# Altium PCB thesis_panel.PcbDoc
Units mm, origin at the board's own origin, x right, y up, seen from the top; angles counter-clockwise.
Board outline 100 x 100 mm, 4 copper layers (Top Layer, Layer 1, Layer 2, Bottom Layer), stack 0.603 mm thick; 6 components, 0 nets, 56 pads, 0 vias.
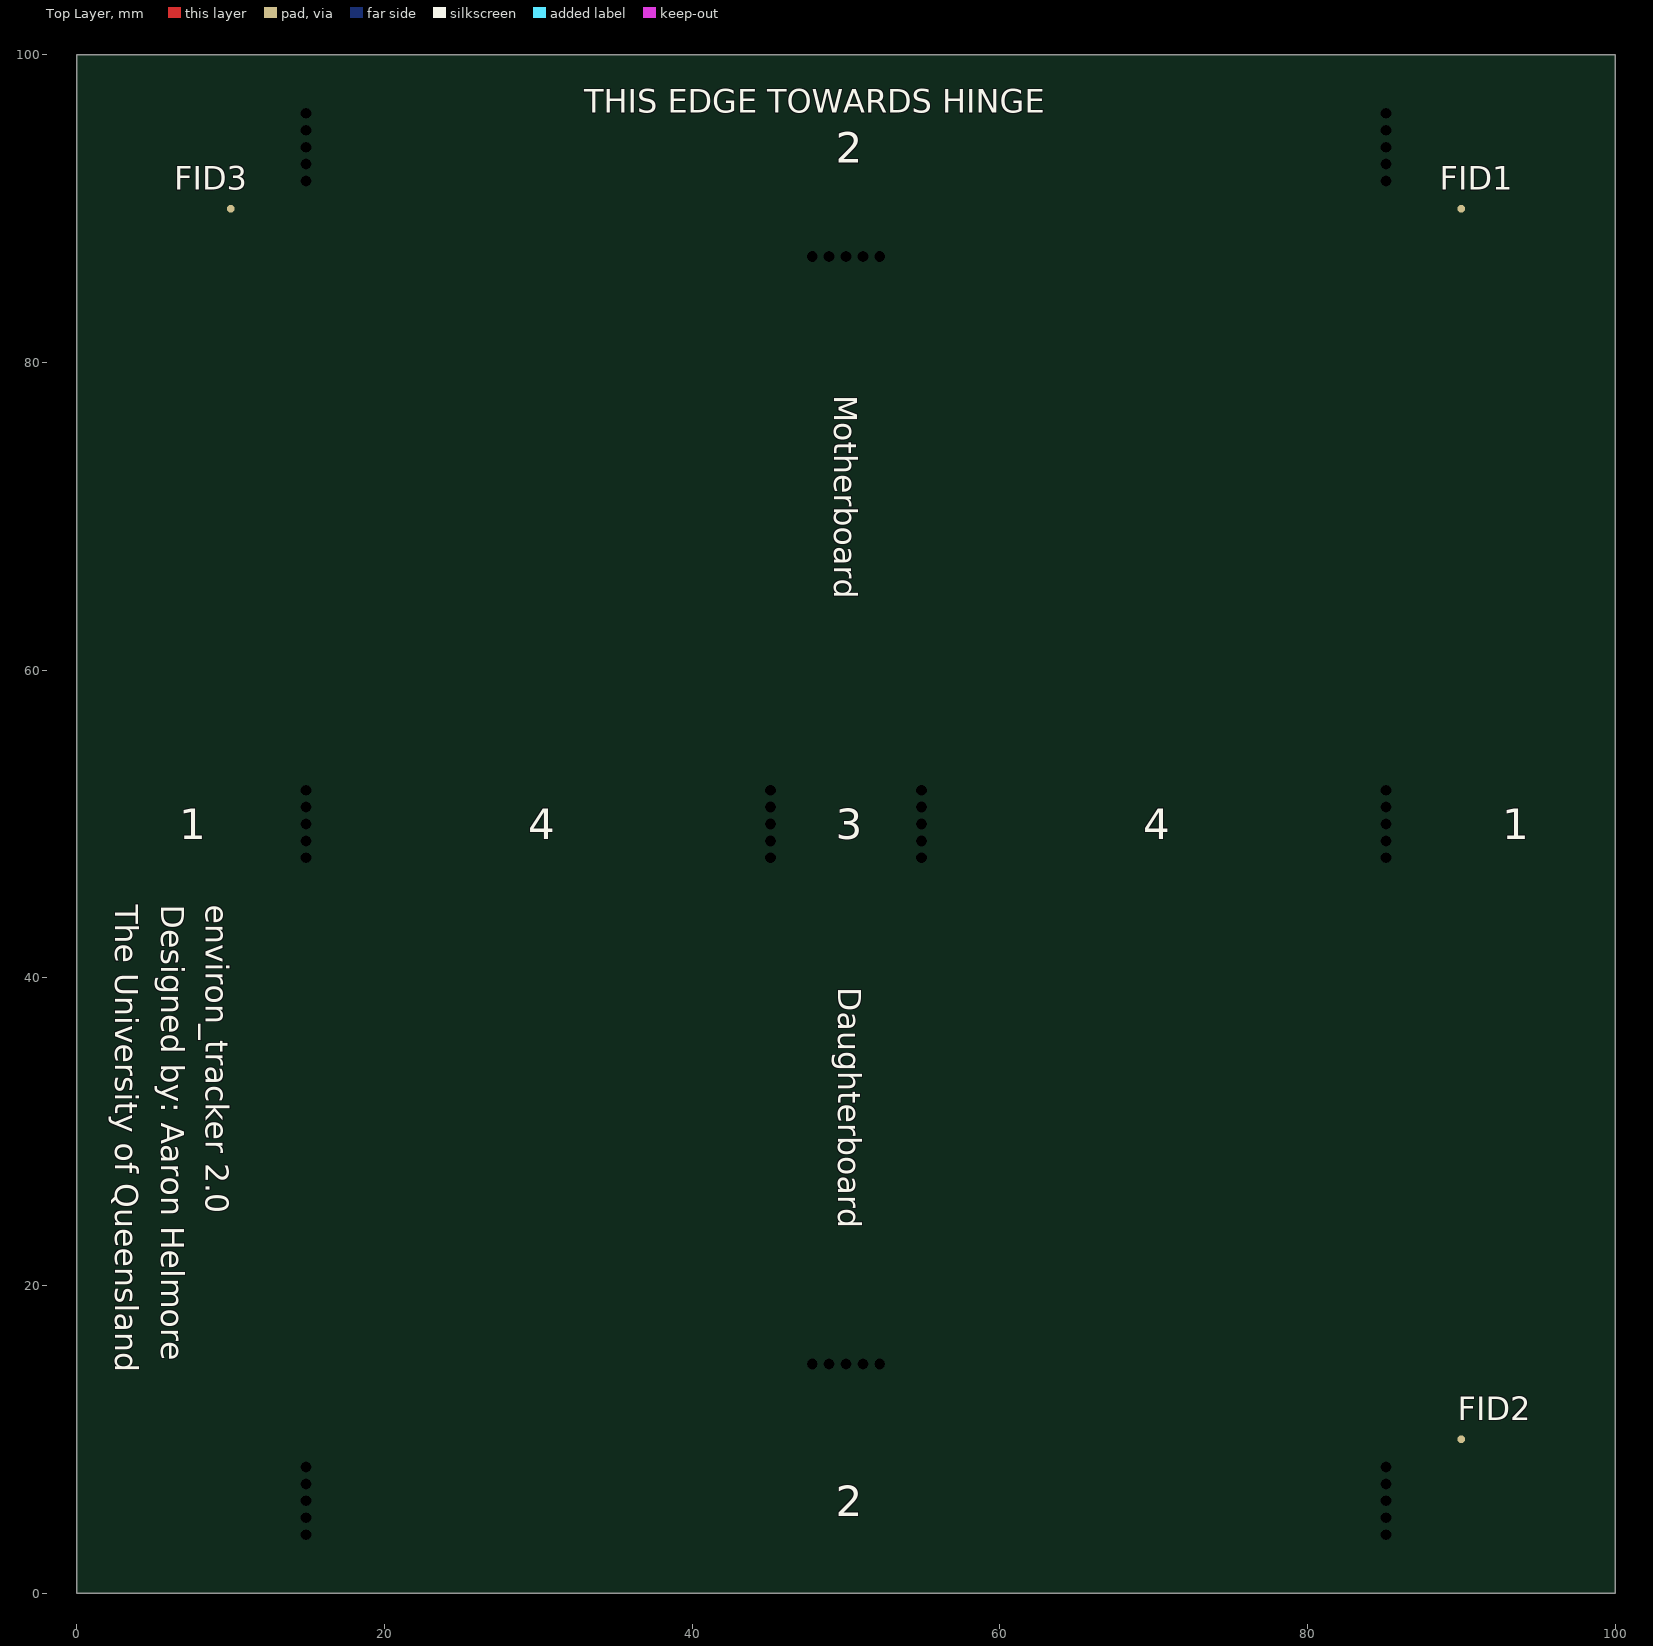
[diagram p0: Top Layer view]
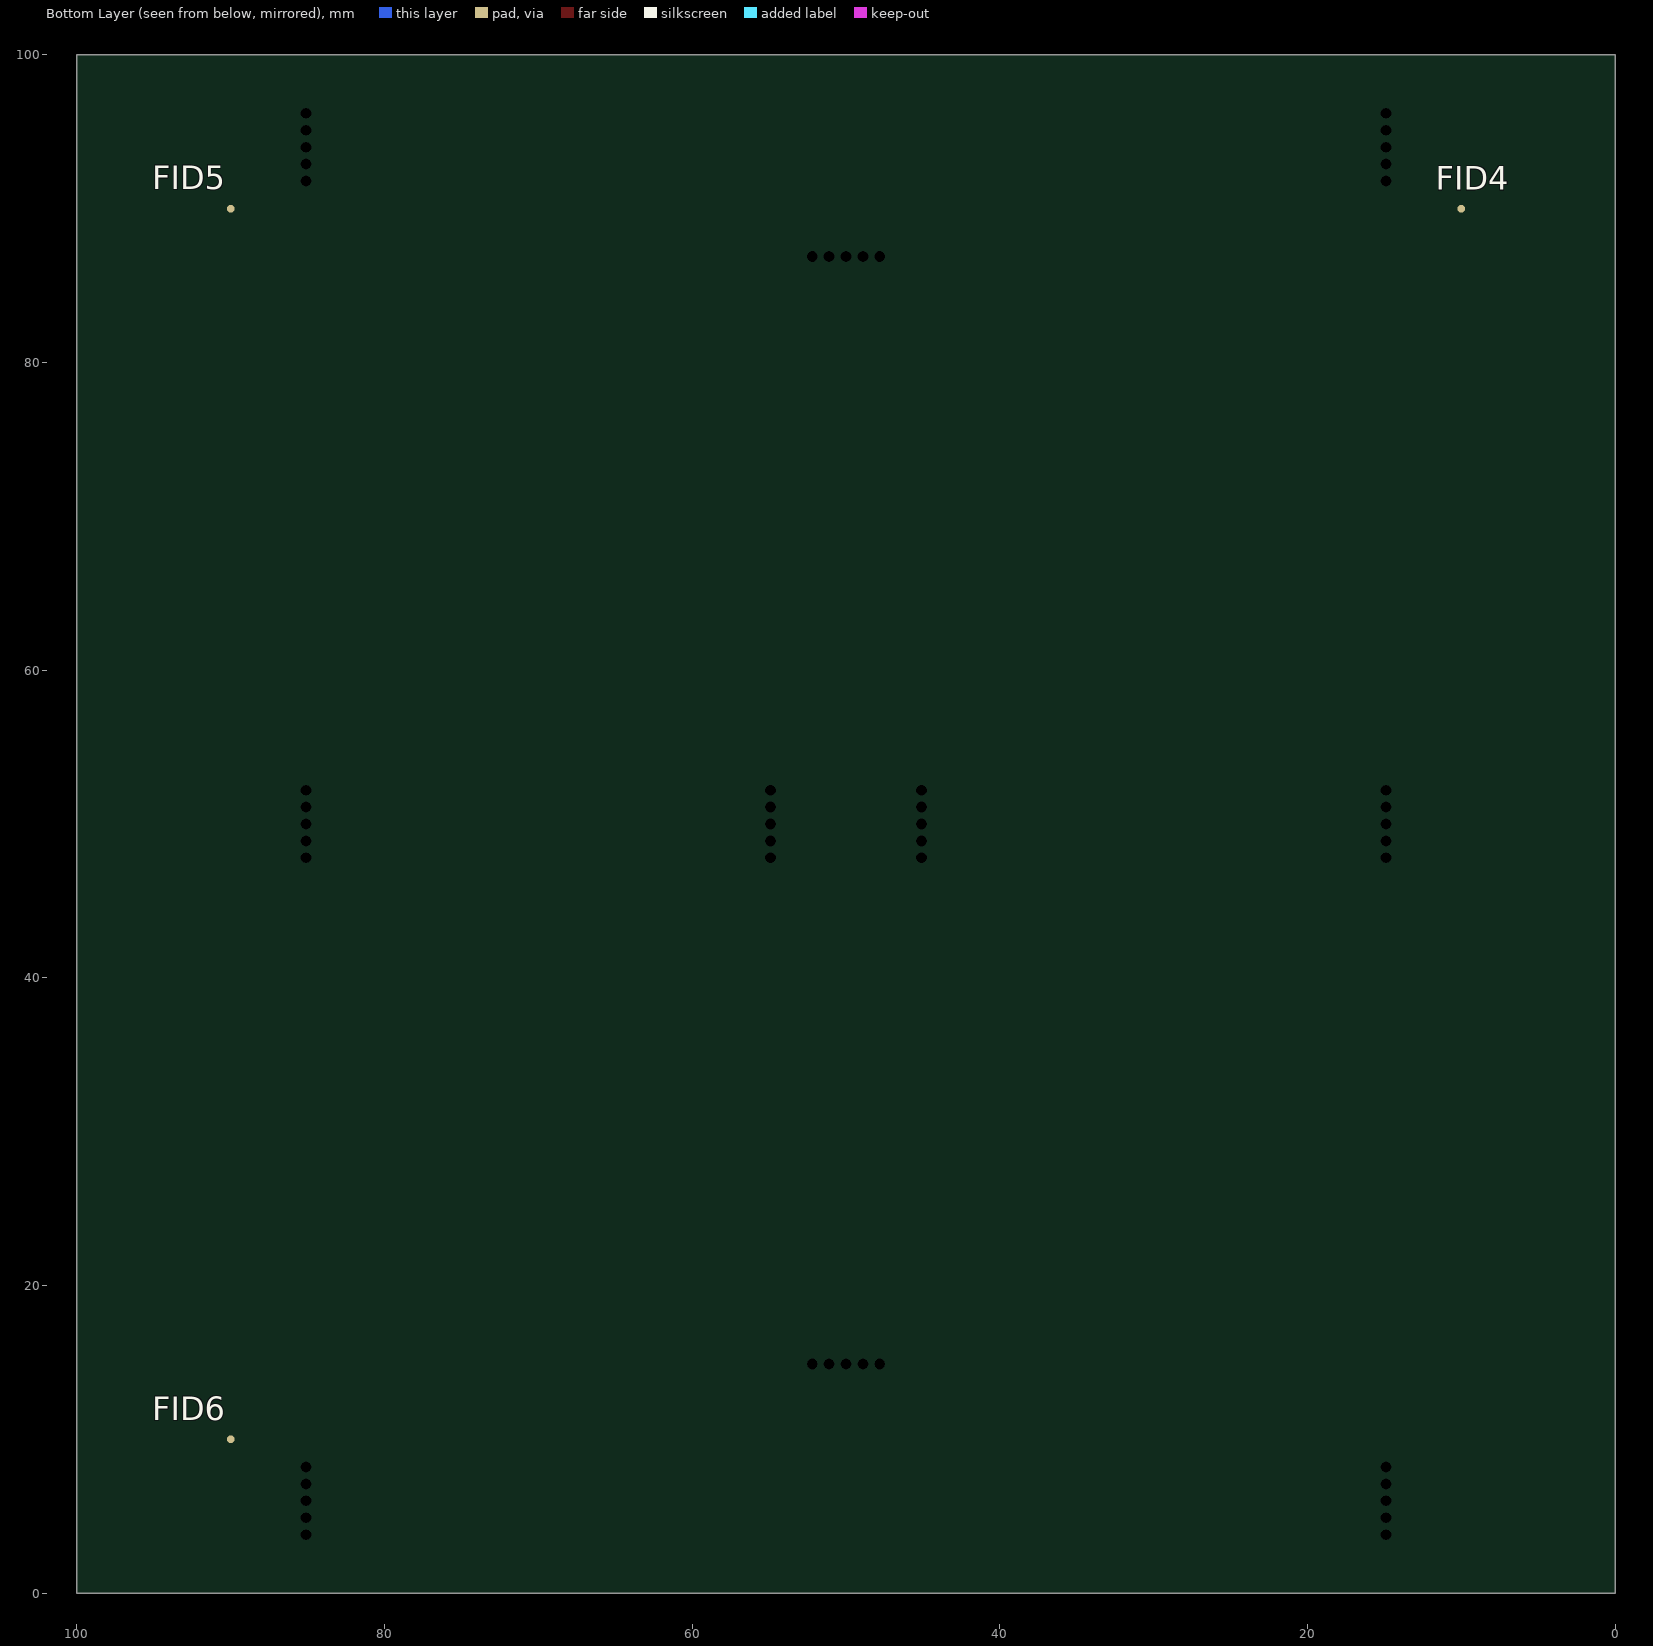
[diagram p1: Bottom Layer view, seen from below]

## Layer stack, top to bottom
Top Solder: solder mask 0.0102, Solder Resist, Dk 3.5
Top Layer: signal copper 0.0356
Dielectric 2: prepreg 0.0711, PP-006, Dk 4.1
Layer 1: signal copper 0.035
Dielectric 1: dielectric 0.32, FR-4, Dk 4.8
Layer 2: signal copper 0.035
Dielectric 3: prepreg 0.0711, PP-006, Dk 4.1
Bottom Layer: signal copper 0.0356
Bottom Solder: solder mask 0.0102, Solder Resist, Dk 3.5

## Board outline
0,0 0,100 100,100 100,0

## Design rules (kind name [scope] priority, off if disabled: settings)
Clearance [All] p1: gap=0.254 ignorepadtopadclearanceinfootprint=FALSE except(0: Arc-Hole Track-Hole SMDPad-Hole THPad-Hole Via-Hole Fill-Hole Poly-Hole Region-Hole Text-Hole)
MaxMinImpedance "Schematic Impedance Constraint_2" [InNetClass('ZOE_RF_LINES')] p1: minimum=49.50 maximum=50.50
MaxMinImpedance "Schematic Impedance Constraint_1" [InNetClass('SX_RF_LINES')] p2: minimum=49.50 maximum=50.50
MaxMinImpedance "Schematic Impedance Constraint" [InNetClass('NRF_RF_LINES')] p3: minimum=49.50 maximum=50.50
PolygonConnect [All] p1: connectstyle=Relief reliefconductorwidth=0.254 reliefentries=4 polygonreliefangle="90 Angle" airgapwidth=0.254
RoutingVias [All] p1: holewidth=0.711 width=1.27 viastyle="Through Hole" minholewidth=0.711 minwidth=1.27 maxholewidth=0.711 maxwidth=1.27
SolderMaskExpansion [All] p1: expansion=0.102 istentingtop=FALSE
Width [All] p1: maxlimit=0.254 minlimit=0.254 preferedwidth=0.254
30 further rules are at their usual default settings.

## Classes and differential pairs
component class MCU: P1

## Components (designator, comment, footprint, x,y, rotation, side; value= is the part's Value field where it differs from the comment)
FID1 "Comment" FIDUCIAL_0.5MM_SOLDER_1MM_MASK 90,90 r0 top
FID2 "Comment" FIDUCIAL_0.5MM_SOLDER_1MM_MASK 90,10 r0 top
FID3 "Comment" FIDUCIAL_0.5MM_SOLDER_1MM_MASK 10,90 r0 top
FID4 "Comment" FIDUCIAL_0.5MM_SOLDER_1MM_MASK 10,90 r180 bottom
FID5 "Comment" FIDUCIAL_0.5MM_SOLDER_1MM_MASK 90,90 r180 bottom
FID6 "Comment" FIDUCIAL_0.5MM_SOLDER_1MM_MASK 90,10 r180 bottom

## Footprints (in the part's own frame and the unit in brackets; to place one, negate y for a bottom-side part, rotate by r counter-clockwise, add the part's x,y. Pads: shape width x height; smd on the part's side, far side on the other; paste and mask are expansions set on the pad)
FIDUCIAL_0.5MM_SOLDER_1MM_MASK [mm]
  round 0.5 smd mask+0.25: 1(0,0)

## Free pads (board coordinates)
  round 0.2 hole 0.7 unplated paste+0 mask+0: MB(14.9,3.8) MB(14.9,4.9) MB(14.9,6) MB(14.9,7.1) MB(14.9,8.2) MB(14.9,47.8) MB(14.9,48.9) MB(14.9,50) MB(14.9,51.1) MB(14.9,52.2) MB(14.9,91.8) MB(14.9,92.9) MB(14.9,94) MB(14.9,95.1) MB(14.9,96.2) MB(45.1,47.8) MB(45.1,48.9) MB(45.1,50) MB(45.1,51.1) MB(45.1,52.2) MB(47.8,14.9) MB(47.8,86.9) MB(48.9,14.9) MB(48.9,86.9) MB(50,14.9) MB(50,86.9) MB(51.1,14.9) MB(51.1,86.9) MB(52.2,14.9) MB(52.2,86.9) MB(54.9,47.8) MB(54.9,48.9) MB(54.9,50) MB(54.9,51.1) MB(54.9,52.2) MB(85.1,3.8) MB(85.1,4.9) MB(85.1,6) MB(85.1,7.1) MB(85.1,8.2) MB(85.1,47.8) MB(85.1,48.9) MB(85.1,50) MB(85.1,51.1) MB(85.1,52.2) MB(85.1,91.8) MB(85.1,92.9) MB(85.1,94) MB(85.1,95.1) MB(85.1,96.2)

## Nets (pads, with @x,y where several pads share a name; then routed paths per layer and width w, separated by ;. In a path a pad name is that pad's centre, name@x,y a point inside that pad or via, vN(x,y) a via of type N, cw(c..) or ccw(c..) an arc to the next point about the centre after c; other vN are vias at no path point)
pads on no net: FID1.1 FID2.1 FID3.1 FID4.1 FID5.1 FID6.1

## Silkscreen, mask and mechanical layers (free items; w line width, h text height)
Top Overlay:
  text "THIS EDGE TOWARDS HINGE" at 32.988,96.254 h1.52
  text "2" at 49.334,93 h2
  text "Motherboard" at 49.25,77.872 h1.5 r270
  text "1" at 6.667,49 h2
  text "4" at 29.334,49 h2
  text "3" at 49.334,49 h2
  text "4" at 69.334,49 h2
  text "1" at 92.667,49 h2
  text "The University of Queensland" at 2.5,44.746 h1.5 r270
  text "Designed by: Aaron Helmore" at 5.5,44.746 h1.5 r270
  text "environ_tracker 2.0" at 8.375,44.746 h1.5 r270
  text "Daughterboard" at 49.5,39.372 h1.5 r270
  text "2" at 49.334,5 h2
Mechanical 1:
  the board outline again, w0.15
Route Tool Path:
  lines w2: 0,101 101,101 101,-1 -1,-1 -1,101 4,101 ; 14,0 14,3 ; 14,9 14,17 ; 14,14 17,14 ; 14,44 14,47 ; 14,46 17,46 ; 14,53 14,56 ; 14,54 16,54 ; 14,84 14,91 ; 14,86 16,86 ; 14,97 14,100 ; 43,46 45.75,46 ; 44,14 47,14 ; 44,54 45.8,54 ; 44.5,86 47,86 ; 46,14 46,16 ; 46,44 46,47 ; 46,53 46,56 ; 46,84 46,86 ; 53,14 57,14 ; 53,86 56,86 ; 54,14 54,17 ; 54,44 54,47 ; 54,46 56,46 ; 54,53 54,56 ; 54,54 56,54 ; 54,84 54,86 ; 83,14 86,14 ; 83,46 86,46 ; 84,54 86,54 ; 84,86 86,86 ; 86,0 86,3 ; 86,9 86,16 ; 86,44 86,47 ; 86,53 86,56 ; 86,84.3 86,91 ; 86,97 86,100

## Panel: embedded boards
"..\thesis_daughterboard\daughterboard.PcbDoc" at 55,45, 1 rows x 1 columns, spacing 63.5 x 38.1, rotation 270
"motherboard.PcbDoc" at 55,55, 1 rows x 1 columns, spacing 63.5 x 38.1, rotation 0
"..\thesis_daughterboard\daughterboard.PcbDoc" at 15,45, 1 rows x 1 columns, spacing 63.5 x 38.1, rotation 270
"motherboard.PcbDoc" at 15,55, 1 rows x 1 columns, spacing 63.5 x 38.1, rotation 0